# EAGLE board smart-tps (EAGLE 9.6.2)
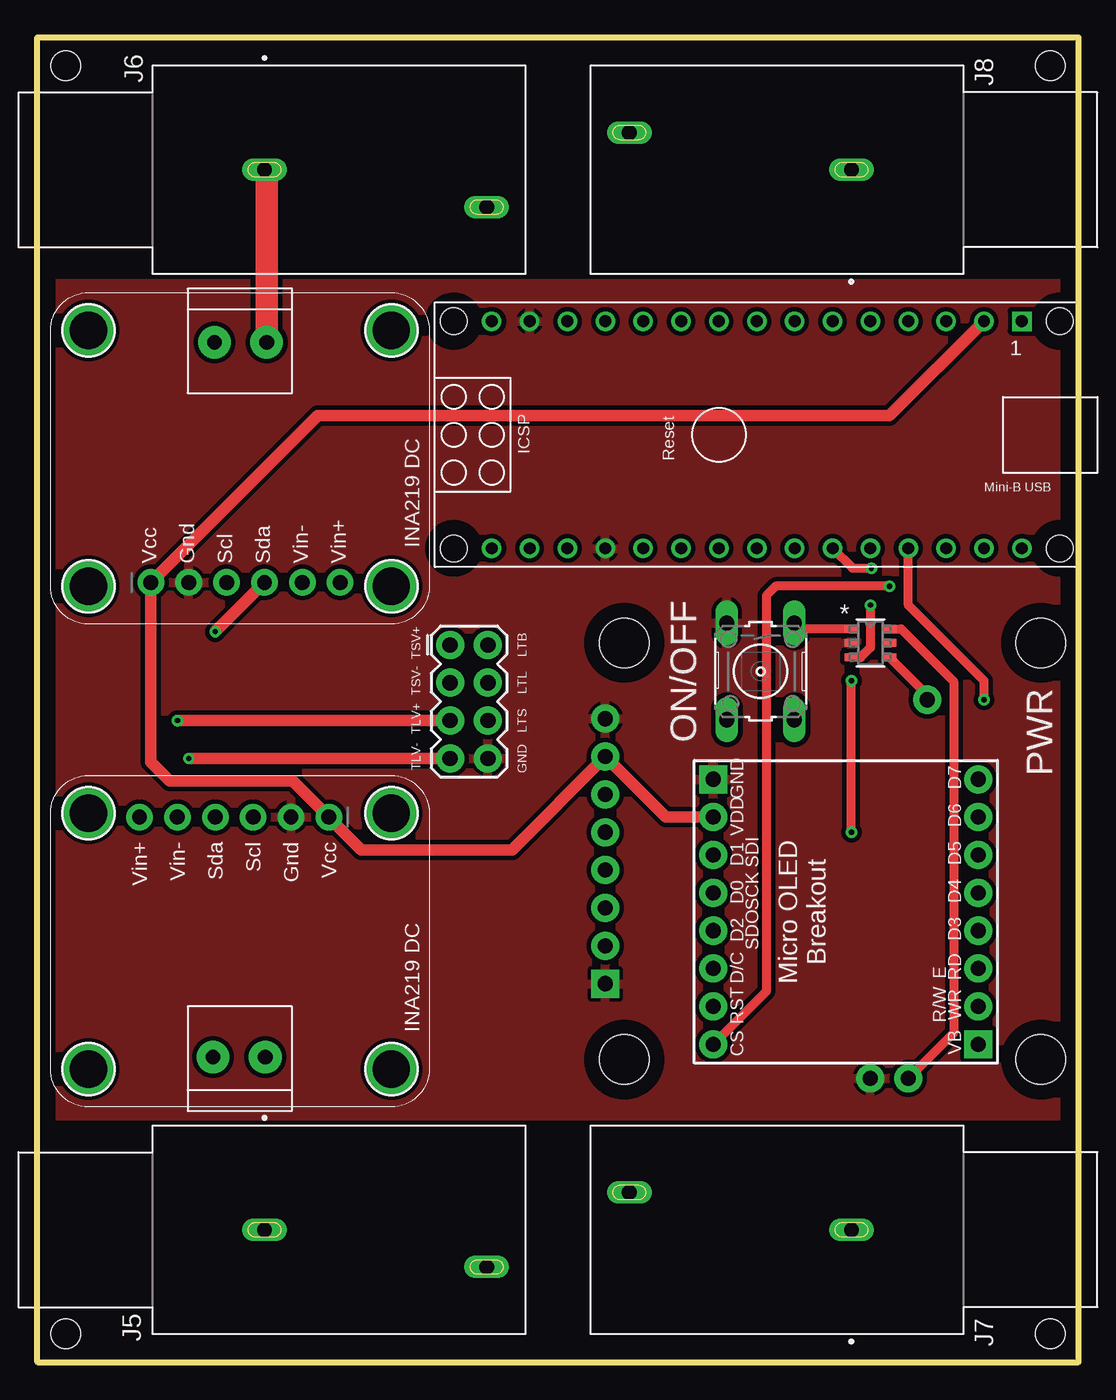
[diagram p0: board, top side]
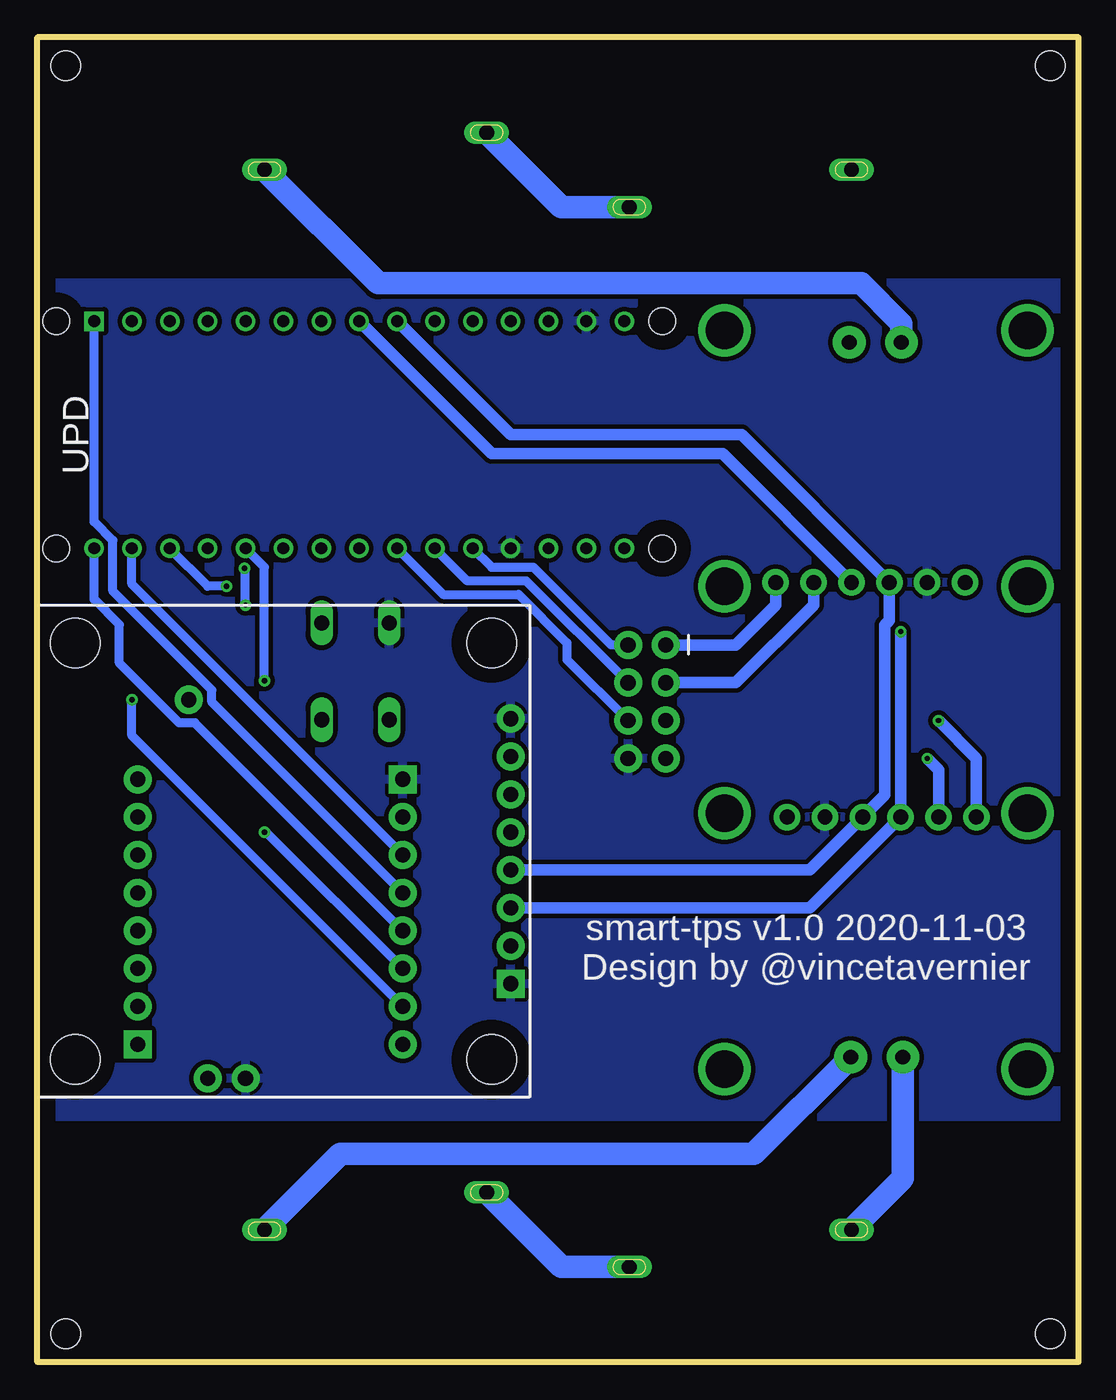
[diagram p1: board, bottom side, seen from below]

Size 69.85 x 88.9 mm. Coordinates in mm from the lower left corner, seen from the top.
Outline: 0,0 69.85,0 69.85,88.9 0,88.9 0,0
Copper layers (1*16): Top 0.035mm / dielectric 0.15mm / Bottom 0.035mm
Design rules "default": minimum track width 6mil, minimum drill 0.35mm, track to track 6mil, track to pad 6mil, pad to pad 6mil, via to via 6mil, smd to smd 6mil, copper to edge 40mil, drill to drill 6mil, minimum pad ring 10mil, minimum via ring 8mil, stop-mask expansion 4mil, vias tented up to drill 0mil, thermal gap 10mil
Net classes: 0 default: width 0.61 mm, clearance 0.305 mm; 1 tool_power: width 1.524 mm, drill 0.356 mm, clearance 0.762 mm; 2 power_supply: width 0.762 mm, clearance 0.305 mm; 3 12_mil: width 0.305 mm
Holes 2 mm at 67.94,87 1.91,87 1.91,1.91 67.94,1.91
bRestrict: area 16,36.3 to 16.1,36.8; area 17.9,36.3 to 18,36.8; area 11,52.1 to 11.2,52.6; area 9.1,52.1 to 9.3,52.6

## Footprints (pad centres in the part's own frame; a part is rotated, then mirrored left to right if it is on the bottom)
ARDUINO_NANO = drill 0.8 square: 1 -20.32,-7.62 | drill 0.8: 2 -17.78,-7.62; 3 -15.24,-7.62; 4 -12.7,-7.62; 5 -10.16,-7.62; 6 -7.62,-7.62; 7 -5.08,-7.62; 8 -2.54,-7.62; 9 0,-7.62; 10 2.54,-7.62; 11 5.08,-7.62; 12 7.62,-7.62; 13 10.16,-7.62; 14 12.7,-7.62; 15 15.24,-7.62; 16 15.24,7.62; 17 12.7,7.62; 18 10.16,7.62; 19 7.62,7.62; 20 5.08,7.62; 21 2.54,7.62; 22 0,7.62; 23 -2.54,7.62; 24 -5.08,7.62; 25 -7.62,7.62; 26 -10.16,7.62; 27 -12.7,7.62; 28 -15.24,7.62; 29 -17.78,7.62; 30 -20.32,7.62 | hole 1.778: -22.86,-7.62; -22.86,7.62; 17.78,7.62; 17.78,-7.62
2X4 = drill 1.016 pad 1.88: 1 -3.81,-1.27; 2 -3.81,1.27; 3 -1.27,-1.27; 4 -1.27,1.27; 5 1.27,-1.27; 6 1.27,1.27; 7 3.81,-1.27; 8 3.81,1.27
1X2-3.5MM = drill 1 pad 2.184: 1 1.8,0; 2 -1.7,0
CUI_SJ-63062A = drill 1 long: 1 0,0; 2 14.9,-2.5
1X06_ROUND_70 = drill 1 pad 1.778: 1 -6.35,0; 2 -3.81,0; 3 -1.27,0; 4 1.27,0; 5 3.81,0; 6 6.35,0
1X08_PIN1_NO_SILK = drill 1.016 pad 1.88 square: 1 0,0 | drill 1.016 pad 1.88: 2 2.54,0; 3 5.08,0; 4 7.62,0; 5 10.16,0; 6 12.7,0; 7 15.24,0; 8 17.78,0
1X04_NO_SILK = drill 1.016 pad 1.88 square: 1 0,0 | drill 1.016 pad 1.88: 2 2.54,0; 3 5.08,0; 4 7.62,0
1X01_NO_SILK = drill 1.016 pad 1.88: 1 0,0
1X02_NO_SILK@1 = drill 1.016 pad 1.88: 1 0,0; 2 2.54,0
B3F-10XX = drill 1.016 long: 1 -3.251,2.261; 2 3.251,2.261; 3 -3.251,-2.261; 4 3.251,-2.261
STAND-OFF = hole 3.302: 0,0
21-0114C_MXM = smd 0.927 x 0.508: 1 -1.264,0.95; 2 -1.264,0; 3 -1.264,-0.95; 4 1.264,-0.95; 5 1.264,0; 6 1.264,0.95
MOUNTINGHOLE_2.5_PLATED = drill 2.5 pad 3.2: P$1 0,0

## Placement (x,y rotation side)
ARDUINO_NANO1  [ARDUINO_NANO]  45.72,62.23 180 top
J1  [2X4]  28.96,44.32 270 top
J2  TERMBLOCK_1X2-3.5MM  [1X2-3.5MM]  13.49,20.47 0 top
J4  TERMBLOCK_1X2-3.5MM  [1X2-3.5MM]  13.69,68.43 180 top
J5  SJ-63062A  [CUI_SJ-63062A]  15.24,8.89 0 top
J6  SJ-63062A  [CUI_SJ-63062A]  15.24,80.01 0 top
J7  SJ-63062A  [CUI_SJ-63062A]  54.61,8.89 180 top
J8  SJ-63062A  [CUI_SJ-63062A]  54.61,80.01 180 top
JP2  [1X06_ROUND_70]  13.21,36.58 180 top
JP4  [1X06_ROUND_70]  13.97,52.32 0 top
JP5  [1X08_PIN1_NO_SILK]  63.12,21.34 90 top
JP6  [1X08_PIN1_NO_SILK]  45.34,39.12 270 top
JP16  [1X04_NO_SILK]  38.1,25.4 90 bottom
JP17  [1X01_NO_SILK]  59.69,44.45 90 bottom
JP18  [1X02_NO_SILK@1]  55.88,19.05 180 bottom
JP21  [1X02_NO_SILK@1]  38.1,43.18 270 bottom
JP24  [1X02_NO_SILK@1]  38.1,38.1 270 bottom
S1  [B3F-10XX]  48.51,46.35 270 top
STANDOFF5  STAND-OFF  [STAND-OFF]  67.31,20.32 90 bottom
STANDOFF6  STAND-OFF  [STAND-OFF]  67.31,48.26 90 bottom
STANDOFF7  STAND-OFF  [STAND-OFF]  39.37,20.32 90 bottom
STANDOFF8  STAND-OFF  [STAND-OFF]  39.37,48.26 90 bottom
U1  MAX16054AZT+  [21-0114C_MXM]  55.88,48.26 0 top
U$18  MOUNTINGHOLE2.5  [MOUNTINGHOLE_2.5_PLATED]  3.43,36.83 180 top
U$19  MOUNTINGHOLE2.5  [MOUNTINGHOLE_2.5_PLATED]  23.75,36.83 180 top
U$20  MOUNTINGHOLE2.5  [MOUNTINGHOLE_2.5_PLATED]  23.75,19.67 180 top
U$21  MOUNTINGHOLE2.5  [MOUNTINGHOLE_2.5_PLATED]  3.43,19.67 180 top
U$40  MOUNTINGHOLE2.5  [MOUNTINGHOLE_2.5_PLATED]  23.75,52.07 0 top
U$41  MOUNTINGHOLE2.5  [MOUNTINGHOLE_2.5_PLATED]  3.43,52.07 0 top
U$42  MOUNTINGHOLE2.5  [MOUNTINGHOLE_2.5_PLATED]  3.43,69.23 0 top
U$43  MOUNTINGHOLE2.5  [MOUNTINGHOLE_2.5_PLATED]  23.75,69.23 0 top

## Library data of the parts
ARDUINO_NANO1 = ArduinoNanoV30
J1 JP5 JP6 JP16-JP18 JP21 JP24 = SparkFun-Connectors
J2 J4 JP2 JP4 U$18-U$21 U$40-U$43 = microbuilder
J5-J8 = SJ-63062A; CUI_PURCHASE_URL: https://www.cuidevices.com/product/interconnect/connectors/audio-connectors/jacks/sj-6306-series?utm_source=snapeda.com&utm_medium=referral&utm_campaign=snapedaBOM; DESCRIPTION: 6.35 mm, Mono and Stereo, Right Angle, Through Hole, 2~3 Conductors, 0~1 Internal Switches, Audio Jack Connector; DIGI-KEY_PART_NUMBER: 2223-SJ-63062A-ND; MF: CUI Devices; MP: SJ-63062A; PACKAGE: Package; PURCHASE-URL: https://pricing.snapeda.com/search/part/SJ-63062A/?ref=eda
S1 = switch-omron; MPN: B3F-1000; OC_FARNELL: 176432; OC_NEWARK: 36M3542
STANDOFF5-STANDOFF8 = SparkFun-Electromechanical
U1 = MAX16054AZT; BUILT_BY: EMA_UL_Team; MANUFACTURER_PART_NUMBER: MAX16054AZT+; REVISION: 1; SOURCELIBRARY: Maxim_2014-05-21; VENDOR: Maxim Integrated Products

## Nets
3V3 [power_supply]: ARDUINO_NANO1.2 JP2.1 JP4.1 JP6.2 JP21.2
5V: ARDUINO_NANO1.12
!CE!: JP24.1
AOFF: ARDUINO_NANO1.25 U1.3
BATTERY_IN: JP18.2 U1.6
CS: ARDUINO_NANO1.28 JP6.8
D3: JP5.4
D4: JP5.5
D5: JP5.6
D6: JP5.7
D7: JP5.8
D/C: ARDUINO_NANO1.26 JP6.6
GND: ARDUINO_NANO1.14 ARDUINO_NANO1.19 J1.8 JP2.2 JP4.2 JP6.1 JP16.1 JP18.1 JP21.1 S1.3 U1.2
GPOUT: JP24.2
LGND [tool_power]: J5.2 J7.2
LTB: ARDUINO_NANO1.20 J1.2
LTL: ARDUINO_NANO1.21 J1.4
LTS: ARDUINO_NANO1.22 J1.6
LV+ [tool_power]: J2.2 J5.1
LV- [tool_power]: J2.1 J7.1
MISO: ARDUINO_NANO1.30 JP6.5
MOSI: ARDUINO_NANO1.29 JP6.3
N$4: S1.1 U1.1
RD/E: JP5.3
RESET: ARDUINO_NANO1.27 JP6.7
SCK: ARDUINO_NANO1.1 JP6.4
SCL: ARDUINO_NANO1.9 JP2.3 JP4.3 JP16.4
SDA: ARDUINO_NANO1.8 JP2.4 JP4.4 JP16.3
SGND [tool_power]: J6.2 J8.2
SV+ [tool_power]: J4.2 J6.1
SV- [tool_power]: J4.1 J8.1
SYSOFF: JP17.1 U1.4
TLV+: J1.5 JP2.6
TLV-: J1.7 JP2.5
TSV+: J1.1 JP4.6
TSV-: J1.3 JP4.5
V_PU: JP16.2
VBAT: JP5.1
VIN: ARDUINO_NANO1.15
WR/RW: JP5.2

## Tracks (layer width: path | path; a pad name or v marks a point on that pad's centre or on a via)
3V3
  Top 0.762: JP6.2 42.16,36.58 JP21.2 31.85,34.39 21.72,34.39 19.56,36.55 JP2.1 17.14,38.99 8.89,38.99 7.62,40.26 JP4.1 18.8,63.5 57.15,63.5 ARDUINO_NANO1.2
AOFF  (via drill 0.36)
  Top 0.61: ARDUINO_NANO1.25 54.68,53.27 v55.94,53.27 | U1.3 54.66,47.27 55.2,47.27 55.88,47.94 v55.88,50.8
  Bottom 0.61: v55.94,53.27 55.94,50.86 v55.88,50.8
BATTERY_IN
  Top 0.61: JP18.2 61.47,22.1 61.47,45.69 57.95,49.21 U1.6
CS  (via drill 0.36)
  Top 0.61: v57.15,52.07 49.53,52.07 48.9,51.44 48.9,24.89 JP6.8
  Bottom 0.61: v57.15,52.07 58.42,52.07 ARDUINO_NANO1.28
D/C  (via drill 0.36)
  Top 0.61: v54.61,35.56 v54.61,45.72
  Bottom 0.61: JP6.6 54.48,35.56 v54.61,35.56 | v54.61,45.72 54.61,53.34 ARDUINO_NANO1.26
GND
  pour Top: 0,72.39 69.85,72.39 69.85,16.51 0,16.51
  pour Bottom: 0,72.39 69.85,72.39 69.85,16.51 0,16.51
LGND
  Bottom 1.524: J5.2 34.71,6.39 J7.2
LTB
  Bottom 0.61: ARDUINO_NANO1.20 39.37,53.34 36.58,53.34 31.37,48.13 J1.2
LTL
  Bottom 0.61: J1.4 37.06,52.43 41.01,52.43 ARDUINO_NANO1.21
LTS
  Bottom 0.61: ARDUINO_NANO1.22 42.62,51.51 37.57,51.51 34.32,48.26 34.32,47.15 J1.6
LV+
  Bottom 1.524: J2.2 11.79,12.34 J5.1
LV-
  Bottom 1.524: J2.1 21.79,13.97 49.53,13.97 J7.1
MISO
  Bottom 0.61: JP6.5 59.28,42.9 60.33,42.9 64.34,46.91 64.34,49.49 66.04,51.19 ARDUINO_NANO1.30
MOSI
  Bottom 0.61: JP6.3 63.5,52.2 ARDUINO_NANO1.29
N$4
  Top 0.61: U1.1 51.17,49.21 S1.1
RESET  (via drill 0.36)
  Top 0.61: v63.5,44.45 63.5,45.72 58.42,50.8 ARDUINO_NANO1.27
  Bottom 0.61: JP6.7 63.5,42.04 v63.5,44.45
SCK
  Bottom 0.61: JP6.4 58.14,44.3 58.14,45.09 64.78,51.73 64.78,55.13 66.04,56.4 ARDUINO_NANO1.1
SCL
  Bottom 0.762: JP16.4 18.03,33.02 JP2.3 13.01,38.05 13.01,49.46 12.7,49.77 JP4.3 22.61,62.23 38.1,62.23 ARDUINO_NANO1.9
SDA  (via drill 0.36)
  Top 0.762: v11.94,49.02 JP4.4
  Bottom 0.762: v11.94,49.02 JP2.4 18.03,30.48 JP16.3 | ARDUINO_NANO1.8 39.37,60.96 23.88,60.96 JP4.4
SGND
  Bottom 1.524: J6.2 34.71,77.51 J8.2
SV+
  Top 1.524: J4.2 15.39,79.86 J6.1
SV-
  Bottom 1.524: J4.1 11.89,69.7 14.58,72.39 46.99,72.39 J8.1
SYSOFF
  Top 0.61: U1.4 58.58,45.88 59.69,44.76 JP17.1
TLV+  (via drill 0.36)
  Top 0.762: J1.5 v9.4,43.05
  Bottom 0.762: v9.4,43.05 6.86,40.51 JP2.6
TLV-  (via drill 0.36)
  Top 0.762: J1.7 v10.16,40.51
  Bottom 0.762: JP2.5 9.4,39.75 v10.16,40.51
TSV+
  Bottom 0.762: JP4.6 20.32,50.8 22.99,48.13 J1.1
TSV-
  Bottom 0.762: JP4.5 17.78,50.8 22.99,45.59 J1.3

## Text on the board
tPlace: INA219 DC | Vcc | Gnd | Scl | Sda | Vin- | Vin+ | PWR | GND | D7 | VDD | D6 | Vin+ | Vin- | Sda | Scl | Gnd | Vcc | D1 | SDI | D5 | D0 | SCK | D4 | Micro OLED / Breakout | INA219 DC | D2 | SDO | D3 | RD | D/C | E | RST | R/W | WR | CS | VB
bPlace: UPD | smart-tps v1.0 2020-11-03 / Design by @vincetavernier
tNames: TSV+ | LTB | TSV- | LTL | ON/OFF | TLV+ | LTS | TLV- | GND
Measures: Units in inches | Units in inches | Units in inches